# Altium PCB pcb-ok.PcbDoc
Units mm, origin at the board's own origin, x right, y up, seen from the top; angles counter-clockwise.
Board outline 56.9 x 68.71 mm, 2 copper layers (Top Layer, Bottom Layer); 5 components, 24 nets, 150 pads, 56 vias.
Unrouted connection lines stored in the file: 30.
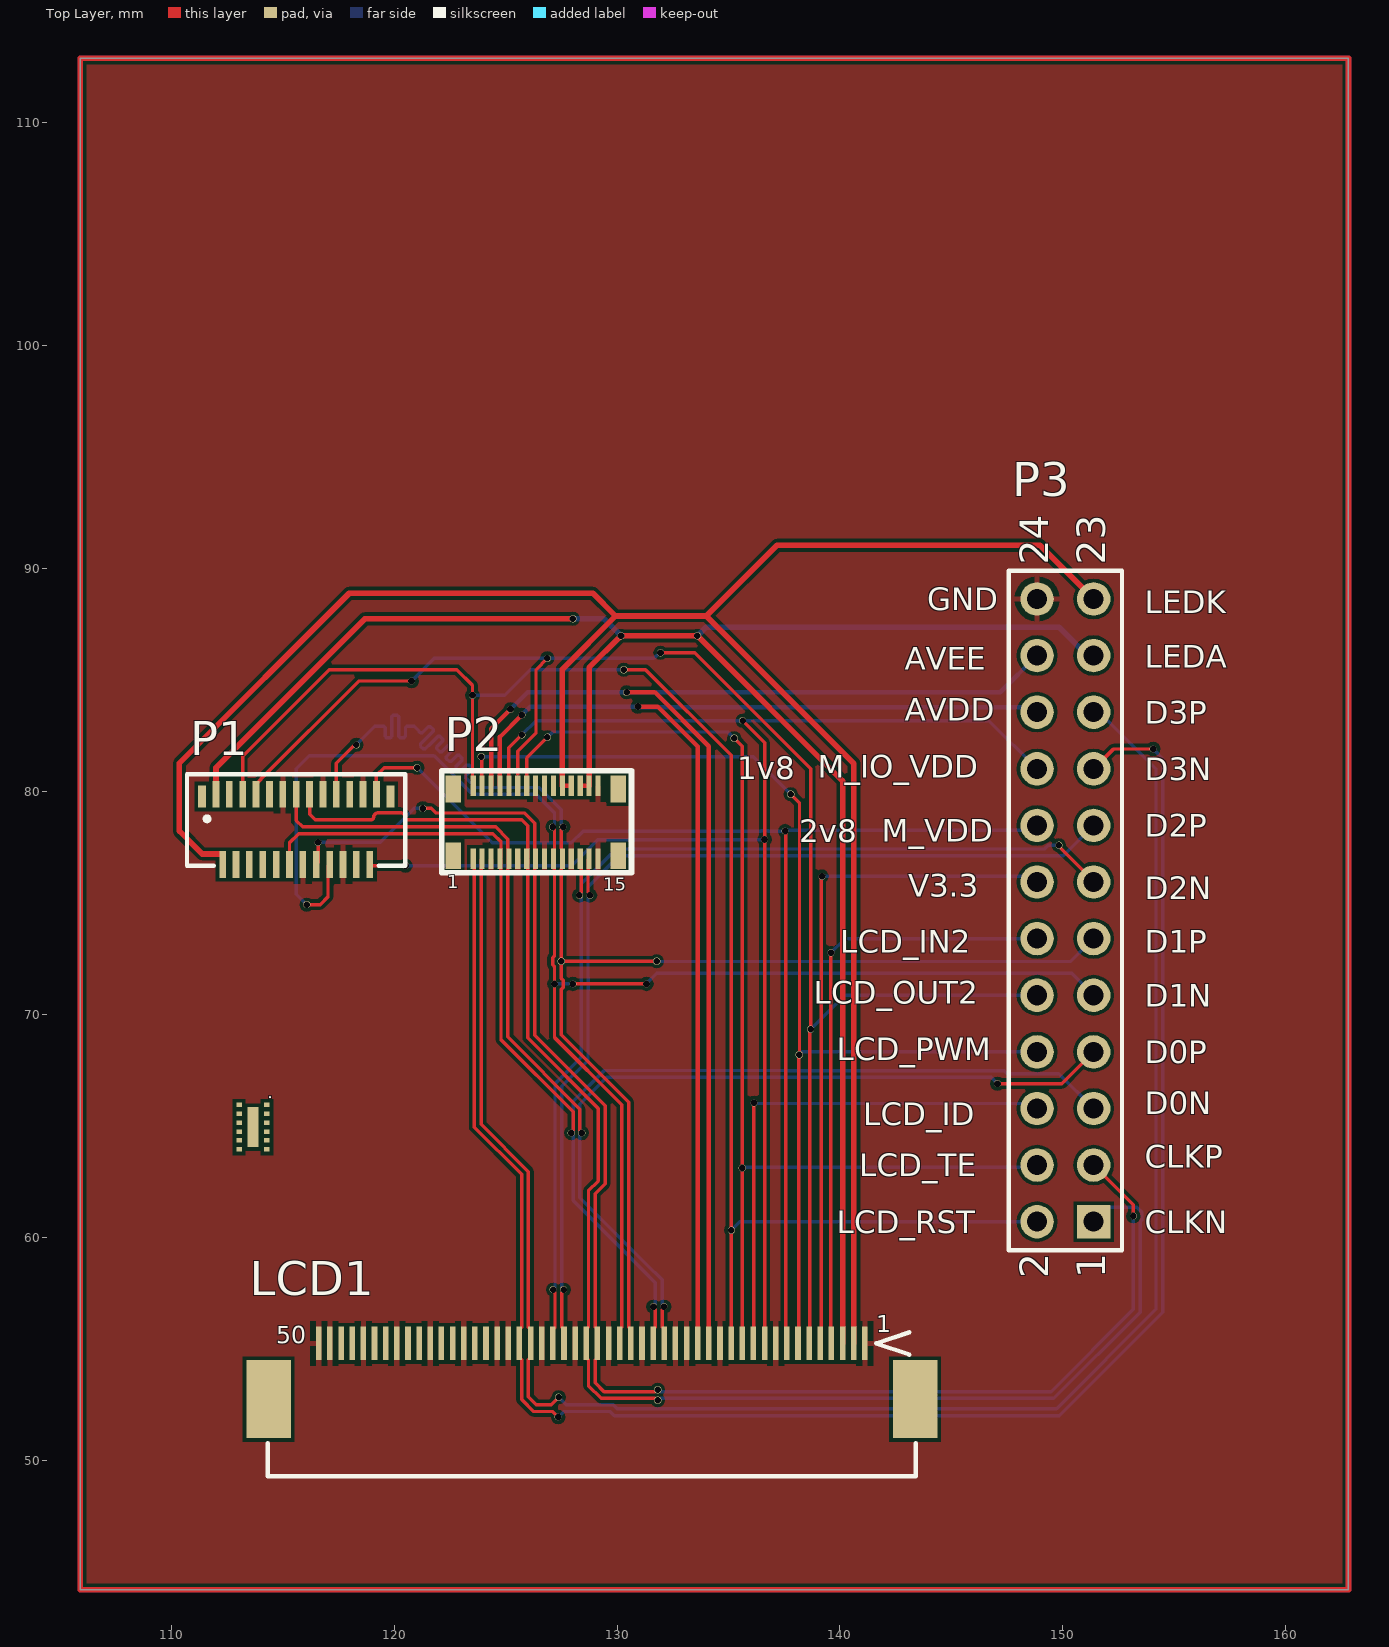
[diagram p0: Top Layer view]
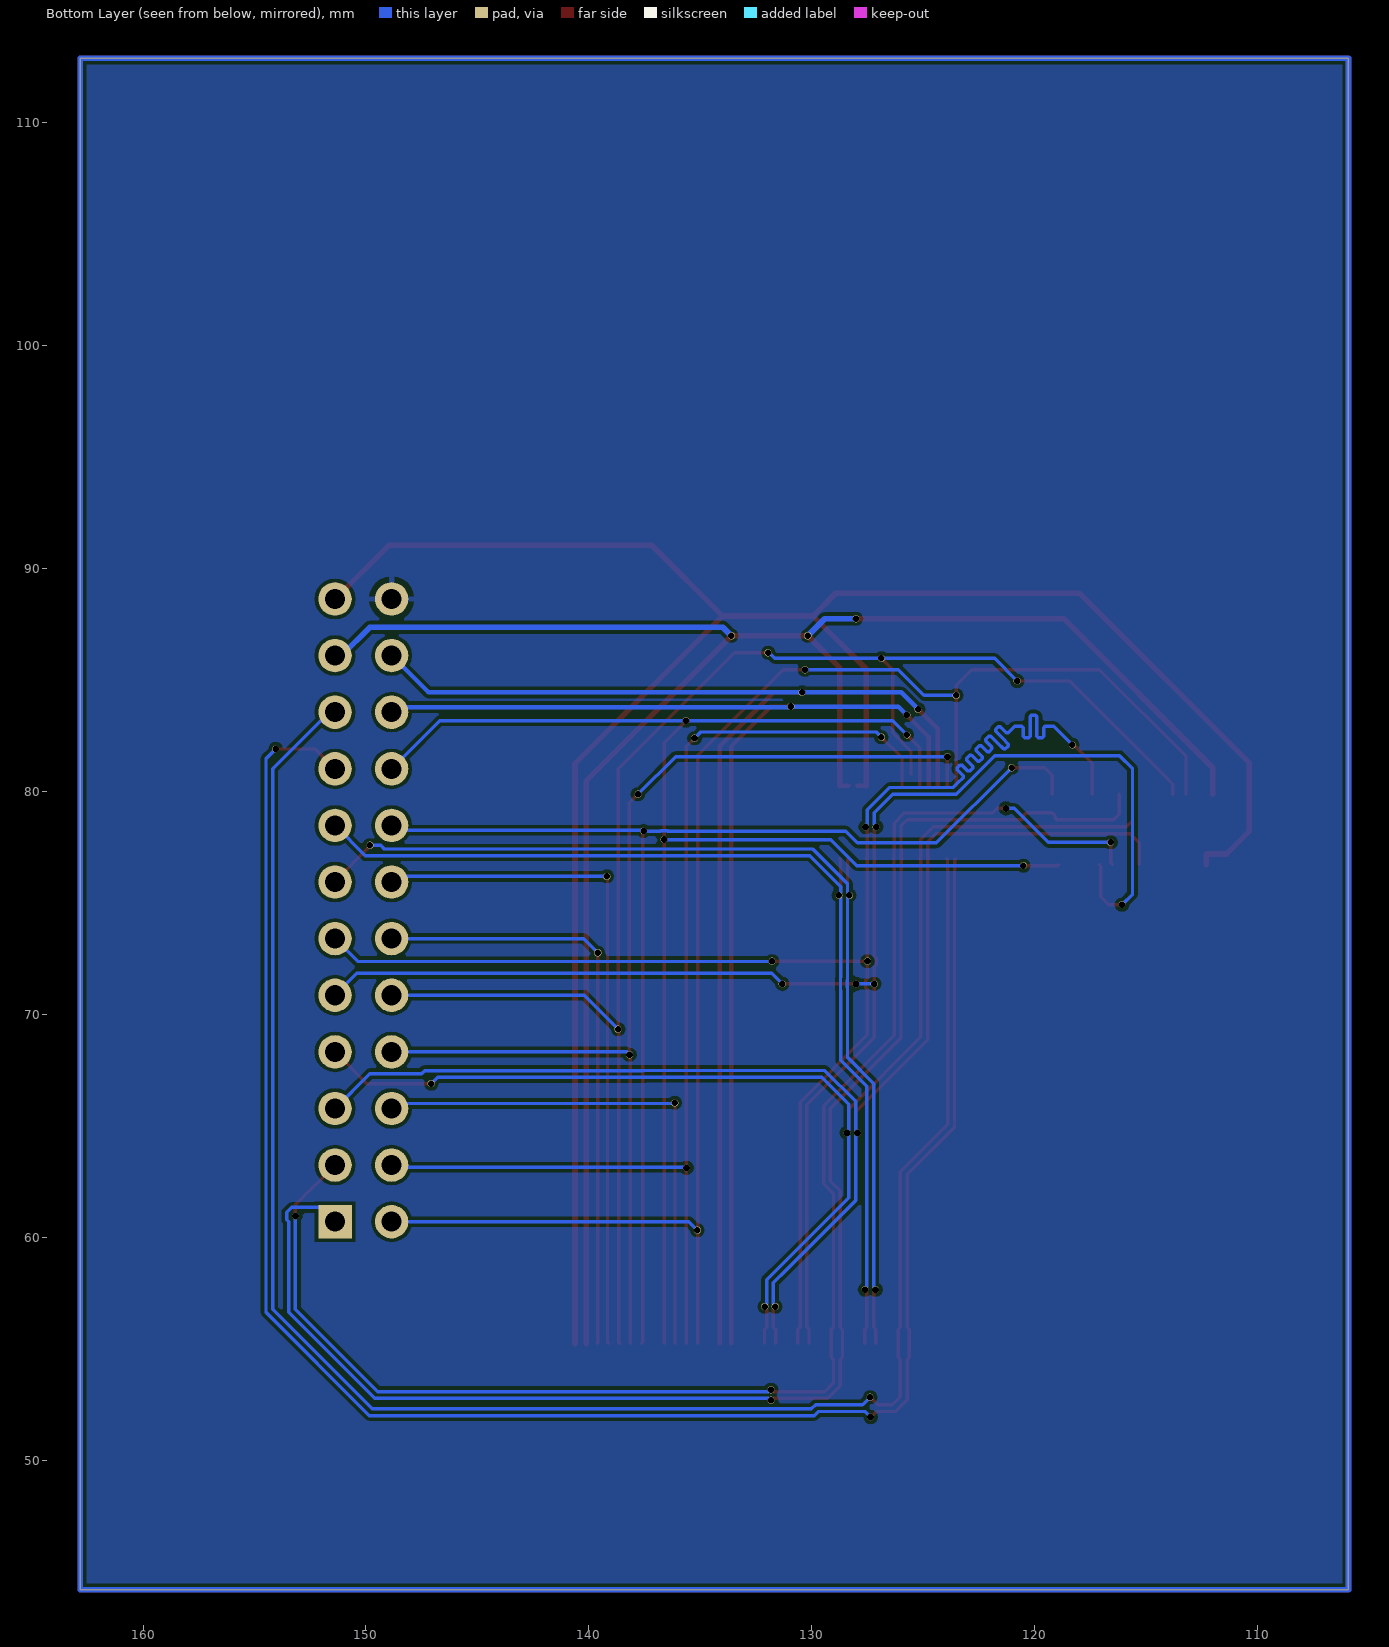
[diagram p1: Bottom Layer view, seen from below]

## Layer stack, top to bottom
Top Solder: solder mask 0.0102, Solder Resist, Dk 3.5
Top Layer: signal copper 0.0356
Dielectric 1: dielectric 0.32, FR-4, Dk 4.8
Bottom Layer: signal copper 0.0356
Bottom Solder: solder mask 0.0102, Solder Resist, Dk 3.5

## Board outline
105.918,44.196 105.918,112.903 162.814,112.903 162.814,44.196

## Design rules (kind name [scope] priority, off if disabled: settings)
Clearance [All] p1: gap=0.152 ignorepadtopadclearanceinfootprint=FALSE
DiffPairsRouting DiffPairsRouting_1 [InDifferentialPair ('MIPI_CLK')] p1: maxlimit=0.254 minlimit=0.152 mostfreqgap=0.152 toplayer_minwidth=0.152 toplayer_maxwidth=0.381 toplayer_prefwidth=0.152 bottomlayer_minwidth=0.152 bottomlayer_maxwidth=0.381 bottomlayer_prefwidth=0.152 maxuncoupledlength=12.7
DiffPairsRouting [All] p2: maxlimit=0.254 minlimit=0.152 mostfreqgap=0.152 toplayer_minwidth=0.152 toplayer_maxwidth=0.381 toplayer_prefwidth=0.152 bottomlayer_minwidth=0.152 bottomlayer_maxwidth=0.381 bottomlayer_prefwidth=0.152 maxuncoupledlength=12.7
HoleToHoleClearance [All] p1: gap=0.152 allowstackedmicrovias=TRUE
MatchedLengths [InDifferentialPair ('MIPI_CLK')] p1: tolerance=25.4 checknetsindiffpair=FALSE checkdiffpairvsdiffpair=TRUE checkxsignals=TRUE checkothers=TRUE
MinimumSolderMaskSliver [All] p1: minsoldermaskwidth=0
PolygonConnect [All] p1: connectstyle=Relief reliefconductorwidth=0.254 reliefentries=4 polygonreliefangle="90 Angle" airgapwidth=0.254
RoutingVias [All] p1: holewidth=0.3 width=0.32 viastyle="Through Hole" minholewidth=0.3 minwidth=0.32 maxholewidth=0.35 maxwidth=0.35
SilkToSilkClearance [All] p1: silktosilkclearance=0
SilkToSolderMaskClearance [IsPad] p1: minsilkscreentomaskgap=0 clearancetoexposedcopper=TRUE
SolderMaskExpansion [All] p1: expansion=0.102
Width [All] p1: maxlimit=0.254 minlimit=0.152 preferedwidth=0.152
25 further rules are at their usual default settings.

## Classes and differential pairs
differential pair class NewClass: MIPI_CLK
net class MIPI_CLK: MIPI_CLK_N MIPI_CLK_P
component class board: LCD1 P1 P2 P3
differential pair MIPI_D3: +MIPI_D3_P -MIPI_D3_N
differential pair MIPI_D2: +MIPI_D2_P -MIPI_D2_N
differential pair MIPI_D0: +MIPI_D0_P -MIPI_D0_N
differential pair MIPI_D1: +MIPI_D1_P -MIPI_D1_N
differential pair MIPI_CLK: +MIPI_CLK_P -MIPI_CLK_N

## Components (designator, comment, footprint, x,y, rotation, side; value= is the part's Value field where it differs from the comment)
LCD1 "AT070TN92" FPC-TOP50 141.119,55.245 r180 top
P1 "Header 25" FPC25-0.3 119.205,79.883 r180 top
P2 "Header 15X2A" FPC30-0.3 122.646,77.124 r0 top
P3 "Header 12X2" HDR2X12 151.384,60.706 r90 top
? "Comment" TDFN12 112.915,63.751 r0 top

## Footprints (in the part's own frame and the unit in brackets; to place one, negate y for a bottom-side part, rotate by r counter-clockwise, add the part's x,y. Pads: shape width x height; smd on the part's side, far side on the other; paste and mask are expansions set on the pad)
FPC25-0.3 [mm]
  rect 0.35x1 smd: 0(-0.625,0.1) 0(7.825,0.1)
  rect 0.3x1.2 smd: 1(7.2,0) 2(6.9,3.15) 3(6.6,0) 4(6.3,3.15) 5(6,0) 6(5.7,3.15) 7(5.4,0) 8(5.1,3.15) 9(4.8,0) 10(4.5,3.15) 11(4.2,0) 12(3.9,3.15) 13(3.6,0) 14(3.3,3.15) 15(3,0) 16(2.7,3.15) 17(2.4,0) 18(2.1,3.15) 19(1.8,0) 20(1.5,3.15) 21(1.2,0) 22(0.9,3.15) 23(0.6,0) 24(0.3,3.15) 25(0,0)
  silkscreen extent -1.3,-0.9 8.5,3.2
FPC30-0.3 [mm]
  rect 0.7x1.2 smd: 0(0,0) 0(0,3) 0(7.4,0) 0(7.4,3)
  rect 0.23x0.92 smd: 1(0.9,-0.14) 2(1.3,-0.14) 3(1.7,-0.14) 4(2.1,-0.14) 5(2.5,-0.14) 6(2.9,-0.14) 7(3.3,-0.14) 8(3.7,-0.14) 9(4.1,-0.14) 10(4.5,-0.14) 11(4.9,-0.14) 12(5.3,-0.14) 13(5.7,-0.14) 14(6.1,-0.14) 15(6.5,-0.14) 16(6.5,3.14) 17(6.1,3.14) 18(5.7,3.14) 19(5.3,3.14) 20(4.9,3.14) 21(4.5,3.14) 22(4.1,3.14) 23(3.7,3.14) 24(3.3,3.14) 25(2.9,3.14) 26(2.5,3.14) 27(2.1,3.14) 28(1.7,3.14) 29(1.3,3.14) 30(0.9,3.14)
  silkscreen extent -0.51,-0.76 8,3.81
FPC-TOP50 [mm]
  rect 0.25x1.5 smd: 1(0,0) 2(0.5,0) 3(1,0) 4(1.5,0) 5(2,0) 6(2.5,0) 7(3,0) 8(3.5,0) 9(4,0) 10(4.5,0) 11(5,0) 12(5.5,0) 13(6,0) 14(6.5,0) 15(7,0) 16(7.5,0) 17(8,0) 18(8.5,0) 19(9,0) 20(9.5,0) 21(10,0) 22(10.5,0) 23(11,0) 24(11.5,0) 25(12,0) 26(12.5,0) 27(13,0) 28(13.5,0) 29(14,0) 30(14.5,0) 31(15,0) 32(15.5,0) 33(16,0) 34(16.5,0) 35(17,0) 36(17.5,0) 37(18,0) 38(18.5,0) 39(19,0) 40(19.5,0) 41(20,0) 42(20.5,0) 43(21,0) 44(21.5,0) 45(22,0) 46(22.5,0) 47(23,0) 48(23.5,0) 49(24,0) 50(24.5,0)
  rect 2x3.5 smd: A(-2.25,2.5) B(26.75,2.5)
  silkscreen extent -2.29,-0.5 26.8,5.97
HDR2X12 [mm] "Connector; Header; 12x2 Position"
  rect 1.5x1.5 hole 0.9: 1(0,0)
  round 1.5 hole 0.9: 2(0,2.54) 3(2.54,0) 4(2.54,2.54) 5(5.08,0) 6(5.08,2.54) 7(7.62,0) 8(7.62,2.54) 9(10.16,0) 10(10.16,2.54) 11(12.7,0) 12(12.7,2.54) 13(15.24,0) 14(15.24,2.54) 15(17.78,0) 16(17.78,2.54) 17(20.32,0) 18(20.32,2.54) 19(22.86,0) 20(22.86,2.54) 21(25.4,0) 22(25.4,2.54) 23(27.94,0) 24(27.94,2.54)
  silkscreen extent -1.27,-1.27 29.21,3.81
TDFN12 [mm]
  rect 0.25x0.2 smd mask+0.102: 1(0.125,0.2) 1(0.125,0.6) 1(0.125,1) 1(0.125,1.4) 1(0.125,1.8) 1(0.125,2.2) 1(1.375,0.2) 1(1.375,0.6) 1(1.375,1) 1(1.375,1.4) 1(1.375,1.8) 1(1.375,2.2)
  rect 0.5x1.8 smd mask+0.102: 1(0.75,1.2)

## Part data
P1: "Header, 25-Pin", LatestRevisionDate=17-Jul-2002, LatestRevisionNote="Re-released for DXP Platform.", Publisher="Altium Limited"
P2: "Header, 15-Pin, Dual row", LatestRevisionDate=17-Jul-2002, LatestRevisionNote="Re-released for DXP Platform.", Publisher="Altium Limited"
P3: "Header, 12-Pin, Dual row", LatestRevisionDate=17-Jul-2002, LatestRevisionNote="Re-released for DXP Platform.", Publisher="Altium Limited"

## Via types
v1: diameter 0.32, hole 0.3, Top Layer to Bottom Layer, 56 vias

## Nets (pads, with @x,y where several pads share a name; then routed paths per layer and width w, separated by ;. In a path a pad name is that pad's centre, name@x,y a point inside that pad or via, vN(x,y) a via of type N, cw(c..) or ccw(c..) an arc to the next point about the centre after c; other vN are vias at no path point)
AVDD: LCD1.16 P2.27 P3.20 | length 57.2
  Top Layer w0.203: P2.27 124.746,82.455 v1(125.73,83.439) ; v1(130.937,83.82) 131.826,83.82 133.619,82.027 LCD1.16
  Bottom Layer w0.203: v1(125.73,83.439) 126.111,83.82 v1(130.937,83.82) 130.959,83.798 148.612,83.798 P3.20
AVEE: LCD1.15 P2.28 P3.22 | length 59.9
  Top Layer w0.203: P2.28 124.346,82.817 v1(125.222,83.693) ; v1(130.429,84.455) 131.699,84.455 134.119,82.035 LCD1.15
  Bottom Layer w0.203: v1(125.222,83.693) 125.984,84.455 v1(130.429,84.455) 147.193,84.455 P3.22
GND: LCD1.1 LCD1.9 LCD1.14 LCD1.17 LCD1.18 LCD1.21 LCD1.24 LCD1.27 LCD1.30 LCD1.33 LCD1.34 LCD1.37 LCD1.40 LCD1.43 LCD1.46 LCD1.49 LCD1.50 P1.11 P1.14 P1.17 P1.20 P1.23 P2.3 P2.6 P2.9 P2.12 P2.15 P2.16 P2.22 P2.23 P3.24
LCD_ID: LCD1.11 P3.6 | length 23.6
  Top Layer w0.152: LCD1.11 136.132,55.257 136.132,66.028 v1(136.144,66.04)
  Bottom Layer w0.152: v1(136.144,66.04) 136.176,66.008 148.622,66.008 P3.6
LCD_IN2: LCD1.4 P3.12 | length 27
  Top Layer w0.152: v1(139.596,72.771) 139.596,55.268 LCD1.4
  Bottom Layer w0.152: v1(139.596,72.771) 140.231,73.406 P3.12
LCD_OUT2: LCD1.6 P1.7 P2.25 P3.10 | length 72.3
  Top Layer w0.152: P1.7 113.805,80.333 114.026,80.554 114.026,80.578 118.412,84.963 v1(120.777,84.963) ; 125.546,80.772 125.546,81.816 126.365,82.635 126.365,85.471 v1(126.873,85.979) ; v1(131.953,86.233) 133.477,86.233 138.684,81.026 v1(138.684,69.342) 138.652,69.31 138.652,55.278 LCD1.6
  Bottom Layer w0.152: v1(120.777,84.963) 121.793,85.979 v1(126.873,85.979) 131.657,85.979 131.911,86.233 v1(131.953,86.233) ; v1(138.684,69.342) 140.208,70.866 P3.10
LCD_PWM: LCD1.7 P2.29 P3.8 | length 51.5
  Top Layer w0.152: v1(123.907,81.573) 123.927,81.554 123.927,80.283 P2.29 ; v1(137.795,79.883) 138.184,79.494 138.184,68.207 v1(138.176,68.199) 138.148,68.171 138.148,55.273 LCD1.7
  Bottom Layer w0.152: v1(123.907,81.573) 136.105,81.573 v1(137.795,79.883) ; v1(138.176,68.199) 138.303,68.326 P3.8
LCD_RST: LCD1.13 P1.5 P2.30 P3.2 | length 72.4
  Top Layer w0.152: P1.5 113.205,81.582 117.094,85.471 122.809,85.471 123.515,84.765 v1(123.515,84.323) 123.515,80.295 P2.30 ; v1(130.302,85.471) 131.276,85.471 135.119,81.628 LCD1.13
  Bottom Layer w0.152: v1(123.515,84.323) 124.963,84.323 126.111,85.471 v1(130.302,85.471) ; v1(135.128,60.325) 135.509,60.706 P3.2
LCD_TE: LCD1.12 P2.24 P3.4 | length 51.7
  Top Layer w0.152: P2.24 125.946,81.512 v1(126.873,82.439) ; v1(135.255,82.394) 135.619,82.03 v1(135.619,63.119) LCD1.12
  Bottom Layer w0.152: v1(126.873,82.439) 127.111,82.677 134.972,82.677 v1(135.255,82.394) ; v1(135.619,63.119) 135.651,63.151 148.749,63.151 P3.4
LEDA: LCD1.3 P1.1 P2.17 P2.18 P3.21 | length 86.5
  Top Layer w0.203: P2.18 P2.17
  Top Layer w0.254: P1.1 112.005,81.076 118.686,87.757 v1(128.016,87.757) ; P2.17 128.746,85.565 v1(130.176,86.995) v1(133.604,86.995) 140.119,80.48 LCD1.3
  Bottom Layer w0.254: v1(128.016,87.757) 129.414,87.757 v1(130.176,86.995) ; v1(133.604,86.995) 133.607,86.995 133.988,87.376 149.823,87.376 151.093,86.106 P3.21
LEDK: LCD1.2 P1.2 P2.19 P2.20 P3.23 | length 97.2
  Top Layer w0.203: P2.20 P2.19
  Top Layer w0.254: P1.2 112.305,77.183 112.282,77.206 111.389,77.206 110.363,78.232 110.363,81.28 117.983,88.9 128.919,88.9 129.935,87.884 ; P2.20 127.546,85.495 129.935,87.884 ; LCD1.2 140.619,81.267 134.002,87.884 ; P3.23 148.971,91.059 137.177,91.059 134.002,87.884 ; 129.935,87.884 134.002,87.884
M_IO_VDD: LCD1.10 P1.24 P2.26 P3.18 | length 73.4
  Top Layer w0.152: P1.24 118.955,76.683 v1(120.505,76.683) ; P2.26 125.146,81.966 v1(125.73,82.55) ; v1(135.636,83.185) 136.619,82.202 v1(136.619,77.851) LCD1.10
  Bottom Layer w0.152: v1(120.505,76.683) 127.971,76.683 129.139,77.851 v1(136.619,77.851) ; v1(125.73,82.55) 126.365,83.185 v1(135.636,83.185) 146.685,83.185 P3.18
M_VDD: LCD1.8 P1.25 P3.16 | length 55.4
  Top Layer w0.152: P1.25 119.205,80.735 119.546,81.076 v1(121.031,81.076) ; v1(137.541,78.232) 137.573,78.2 137.573,55.291 LCD1.8
  Bottom Layer w0.152: v1(121.031,81.076) 124.403,77.704 127.946,77.704 128.474,78.232 136.45,78.232 136.458,78.24 136.78,78.24 136.788,78.232 v1(137.541,78.232) 137.573,78.264 148.622,78.264 P3.16
MIPI_CLK_N: LCD1.26 P1.15 P2.7 P3.1 | length 71.7
  Top Layer w0.152: P1.15 116.205,78.995 116.46,78.74 118.364,78.74 118.974,78.74 ccw(c118.974,78.841) 119.075,78.841 cw(c119.289,78.841) 119.289,79.054 120.284,79.054 cw(c120.284,78.841) 120.498,78.841 ccw(c120.599,78.841) 120.599,78.74 120.777,78.74 125.717,78.74 125.994,78.463 125.994,77.454 125.985,77.445 125.985,77.023 P2.7 125.985,76.945 125.985,76.523 125.994,76.514 125.994,68.951 129.159,65.786 129.159,62.531 128.717,62.088 128.717,55.968 128.619,55.87 LCD1.26 128.619,54.62 128.717,54.522 128.717,53.353 129.288,52.781 131.697,52.781 131.781,52.697 v1(131.826,52.697)
  Bottom Layer w0.152: v1(131.826,52.697) 131.871,52.697 131.955,52.781 149.597,52.781 153.467,56.651 153.467,60.706 153.551,60.79 153.551,61.121 153.323,61.349 152.027,61.349 P3.1
MIPI_CLK_P: LCD1.25 P1.16 P2.8 P3.3 | length 71.5
  Top Layer w0.152: P1.16 116.586,76.814 v1(116.586,77.724) ; v1(121.285,79.248) 121.666,79.248 121.869,79.045 125.843,79.045 126.298,78.589 126.298,77.454 126.307,77.445 126.307,77.023 P2.8 126.307,76.945 126.307,76.523 126.298,76.514 126.298,69.078 129.464,65.912 129.464,62.404 129.021,61.962 129.021,55.968 129.119,55.87 LCD1.25 129.119,54.62 129.021,54.522 129.021,53.479 129.414,53.086 131.697,53.086 131.781,53.17 v1(131.826,53.17) ; P3.3 153.162,61.468 v1(153.162,60.96)
  Bottom Layer w0.152: v1(116.586,77.724) 119.38,77.724 120.904,79.248 v1(121.285,79.248) ; v1(131.826,53.17) 131.871,53.17 131.955,53.086 149.471,53.086 153.162,56.777 v1(153.162,60.96)
MIPI_D0_N: LCD1.20 P1.12 P2.4 P3.5 | length 62.3
  Top Layer w0.152: P1.12 115.305,77.704 115.713,78.113 124.428,78.113 124.794,77.747 124.794,77.454 124.785,77.445 124.785,77.023 P2.4 124.785,76.945 124.785,76.523 124.794,76.514 124.794,68.868 128.03,65.632 v1@128.03,64.818 ; LCD1.20 131.619,55.87 131.717,55.968 131.717,56.767 131.633,56.851 v1(131.633,56.896)
  Bottom Layer w0.152: v1(131.633,56.896) 131.633,56.941 131.717,57.025 131.717,57.971 131.102,58.585 128.03,61.658 128.03,64.559 127.946,64.643 v1(127.946,64.688) 127.946,64.734 128.03,64.818 128.03,66.104 129.414,67.489 137.567,67.489 ; 137.568,67.488 147.366,67.488 147.507,67.347 149.823,67.347 P3.5
MIPI_D0_P: LCD1.19 P1.13 P2.5 P3.7 | length 62.1
  Top Layer w0.152: P1.13 115.605,78.705 115.893,78.417 124.554,78.417 125.098,77.873 125.098,77.454 125.107,77.445 125.107,77.023 P2.5 125.107,76.945 125.107,76.523 125.098,76.514 125.098,68.995 128.335,65.759 v1@128.335,64.818 ; v1(132.105,56.896) 132.105,56.851 132.021,56.767 132.021,55.968 132.119,55.87 LCD1.19 ; v1(147.066,66.902) 149.96,66.902 P3.7
  Bottom Layer w0.152: v1(132.105,56.896) 132.105,56.941 132.021,57.025 132.021,58.098 131.318,58.801 131.229,58.89 128.335,61.784 128.335,64.559 128.418,64.643 v1(128.418,64.688) 128.418,64.734 128.335,64.818 128.335,65.978 129.541,67.184 137.441,67.184 ; 137.441,67.183 146.785,67.183 v1(147.066,66.902)
MIPI_D1_N: LCD1.23 P1.18 P2.10 P3.9 | length 71.8
  Top Layer w0.152: v1(116.078,74.93) 116.678,74.93 117.031,75.283 117.031,76.659 P1.18 ; v1(127.11,78.417) 127.11,78.372 127.194,78.288 127.194,77.454 127.185,77.445 127.185,77.023 P2.10 127.185,76.945 127.185,76.523 127.194,76.514 127.194,72.635 127.11,72.551 127.11,72.229 127.194,72.145 v1(127.194,71.374) 127.194,68.971 130.217,65.948 130.217,55.968 130.119,55.87 LCD1.23 ; v1(128.016,71.374) v1(131.318,71.374)
  Bottom Layer w0.152: v1(116.078,74.93) 115.605,75.403 115.605,81.026 116.189,81.61 118.491,81.61 121.789,81.61 123.515,79.884 126.364,79.884 127.194,79.054 127.194,78.547 127.11,78.463 v1(127.11,78.417) ; v1(127.194,71.374) v1(128.016,71.374) ; v1(131.318,71.374) 131.789,71.845 150.405,71.845 P3.9
MIPI_D1_P: LCD1.22 P1.19 P2.11 P3.11 | length 71.4
  Top Layer w0.152: P1.19 117.405,81.278 118.196,82.069 118.273,82.069 v1(118.305,82.101) ; v1(127.582,78.417) 127.582,78.372 127.498,78.288 127.498,77.454 127.507,77.445 127.507,77.023 P2.11 127.507,76.945 127.507,76.523 127.498,76.514 v1(127.498,72.39) ; LCD1.22 130.619,55.87 130.521,55.968 130.521,66.075 127.498,69.098 127.498,71.129 127.582,71.213 127.582,71.535 127.498,71.619 v1(127.498,72.39) ; v1(131.781,72.39) v1(127.498,72.39)
  Bottom Layer w0.152: v1(118.305,82.101) 119.135,82.931 119.288,82.931 119.531,82.931 119.592,82.87 119.592,82.489 119.653,82.428 119.836,82.428 119.897,82.489 119.897,82.931 119.897,83.373 119.958,83.434 120.141,83.434 120.202,83.373 120.202,82.931 120.202,82.489 120.263,82.428 120.446,82.428 120.507,82.489 120.507,82.87 120.568,82.931 120.812,82.931 120.899,82.931 121.007,82.823 121.179,82.651 121.265,82.651 121.535,82.921 121.621,82.921 121.751,82.791 121.751,82.705 121.438,82.392 121.179,82.134 121.179,82.047 121.309,81.918 121.395,81.918 121.653,82.177 121.966,82.49 122.052,82.49 122.182,82.36 122.182,82.274 121.912,82.004 121.912,81.918 122.041,81.789 122.128,81.789 122.397,82.058 122.484,82.058 122.613,81.929 122.613,81.843 122.343,81.573 122.343,81.487 122.472,81.358 122.559,81.358 122.828,81.627 122.915,81.627 123.044,81.498 123.044,81.412 122.774,81.142 122.774,81.056 122.903,80.927 122.99,80.927 123.259,81.196 123.346,81.196 123.475,81.067 123.475,80.981 123.205,80.711 123.205,80.625 123.439,80.391 123.642,80.189 126.491,80.189 127.498,79.181 127.498,78.547 127.582,78.463 v1(127.582,78.417) ; v1(131.781,72.39) 131.788,72.382 150.36,72.382 P3.11
MIPI_D2_N: LCD1.29 P2.13 P3.13 | length 47.3
  Top Layer w0.152: LCD1.29 127.119,55.87 127.217,55.968 127.217,57.529 127.133,57.613 v1(127.133,57.658) ; P2.13 128.385,76.945 128.385,76.523 128.394,76.514 v1@128.394,75.475 ; v1(149.823,77.597) 149.823,77.552 151.384,75.991 P3.13
  Bottom Layer w0.152: v1(127.133,57.658) 127.133,57.703 127.217,57.787 127.217,66.902 128.394,68.079 128.394,71.202 128.405,71.213 128.405,71.535 128.394,71.546 128.394,75.217 128.31,75.301 v1(128.31,75.346) 128.31,75.391 128.394,75.475 128.394,75.861 129.962,77.429 149.171,77.429 149.339,77.597 v1(149.823,77.597)
MIPI_D2_P: LCD1.28 P2.14 P3.15 | length 46.5
  Top Layer w0.152: v1(127.605,57.658) 127.605,57.613 127.521,57.529 127.521,55.968 127.619,55.87 LCD1.28 ; v1@128.698,75.475 128.698,76.514 128.707,76.523 128.707,76.945 P2.14
  Bottom Layer w0.152: v1(127.605,57.658) 127.605,57.703 127.521,57.787 127.521,66.776 128.698,67.953 128.698,71.076 128.709,71.087 128.709,71.661 128.698,71.672 128.698,75.217 128.782,75.301 v1(128.782,75.346) 128.782,75.391 128.698,75.475 128.698,75.735 130.088,77.124 150.022,77.124 P3.15
MIPI_D3_N: LCD1.32 P2.1 P3.17 | length 84.9
  Top Layer w0.152: P2.1 123.585,76.945 123.585,76.523 123.594,76.514 123.594,64.951 125.717,62.828 125.717,55.968 125.619,55.87 LCD1.32 125.619,54.62 125.717,54.522 125.717,52.729 126.256,52.189 127.112,52.189 v1(127.358,51.943) ; P3.17 152.273,81.915 v1(154.051,81.915)
  Bottom Layer w0.152: v1(127.358,51.943) 127.604,52.189 129.698,52.189 129.883,52.004 149.844,52.004 154.483,56.643 154.483,81.483 v1(154.051,81.915)
MIPI_D3_P: LCD1.31 P2.2 P3.19 | length 83.7
  Top Layer w0.152: P2.2 123.907,76.945 123.907,76.523 123.898,76.514 123.898,65.078 126.021,62.955 126.021,55.968 126.119,55.87 LCD1.31 126.119,54.62 126.021,54.522 126.021,52.855 126.382,52.494 127.043,52.494 v1(127.381,52.832)
  Bottom Layer w0.152: v1(127.381,52.832) 127.719,52.494 129.824,52.494 130.01,52.309 149.718,52.309 154.178,56.769 154.178,81.026 151.638,83.566 P3.19
V3.3: LCD1.5 P3.14 | length 30.7
  Top Layer w0.152: LCD1.5 139.16,55.286 139.16,76.168 v1(139.192,76.2)
  Bottom Layer w0.152: v1(139.192,76.2) 148.59,76.2 P3.14
pads on no net: ?.1 LCD1.35 LCD1.36 LCD1.38 LCD1.39 LCD1.41 LCD1.42 LCD1.44 LCD1.45 LCD1.47 LCD1.48 LCD1.A LCD1.B P1.0 P1.3 P1.4 P1.6 P1.8 P1.9 P1.10 P1.21 P1.22 P2.0 P2.21

## Polygon pours and split planes (outlines as drawn)
GND on Bottom Layer "Bottom Layer-GND" (solid, pour order 2): 105.918,112.903 162.814,112.903 162.814,44.196 105.918,44.196
GND on Top Layer "Top Layer-GND" (solid, pour order 0): 105.918,112.903 162.814,112.903 162.814,44.196 105.918,44.196

## Other copper
Multi-Layer:
  the board outline again, w0.254

## Silkscreen, mask and mechanical layers (free items; w line width, h text height)
Top Overlay:
  text "GND" at 143.912,88.138 h1.02
  text "LEDK" at 153.67,88.011 h1.02
  text "LEDA" at 153.67,85.565 h1.02
  text "AVEE" at 142.897,85.471 h1.02
  text "AVDD" at 142.897,83.185 h1.02
  text "D3P" at 153.67,83.058 h1.02
  text "M_IO_VDD" at 139.003,80.625 h1.02
  text "1v8" at 135.382,80.554 h1.02
  text "D3N" at 153.67,80.518 h1.02
  text "D2P" at 153.67,77.978 h1.02
  text "M_VDD" at 141.881,77.747 h1.02
  text "2v8" at 138.184,77.724 h1.02
  text "V3.3" at 143.066,75.283 h1.02
  text "D2N" at 153.67,75.184 h1.02
  text "LCD_IN2" at 140.019,72.771 h1.02
  text "D1P" at 153.67,72.771 h1.02
  text "LCD_OUT2" at 138.834,70.485 h1.02
  text "D1N" at 153.67,70.358 h1.02
  text "LCD_PWM" at 139.85,67.945 h1.02
  text "D0P" at 153.67,67.818 h1.02
  text "D0N" at 153.67,65.532 h1.02
  text "LCD_ID" at 141.035,65.024 h1.02
  text "CLKP" at 153.67,63.119 h1.02
  text "LCD_TE" at 140.865,62.738 h1.02
  text "LCD_RST" at 139.85,60.198 h1.02
  text "CLKN" at 153.67,60.198 h1.02

## Text inside footprints (layer, text, board x,y; h text height)
LCD1: Top Overlay "50" at 114.703,55.245 h0.76; Top Overlay "1" at 141.627,55.753 h0.76
P2: Top Overlay "1" at 122.392,75.473 h1.02; Top Overlay "15" at 129.377,75.346 h1.02
P3: Top Overlay "1" at 151.892,58.166 h1.27 r90; Top Overlay "2" at 149.352,58.166 h1.27 r90; Top Overlay "23" at 151.892,90.17 h1.27 r90; Top Overlay "24" at 149.352,90.17 h1.27 r90